# Altium PCB Nrf2Serial.PcbDoc
Units mm, origin at the board's own origin, x right, y up, seen from the top; angles counter-clockwise.
Board outline 67.95 x 20.8 mm, 2 copper layers (Top Layer, Bottom Layer); 14 components, 18 nets, 83 pads, 9 vias.
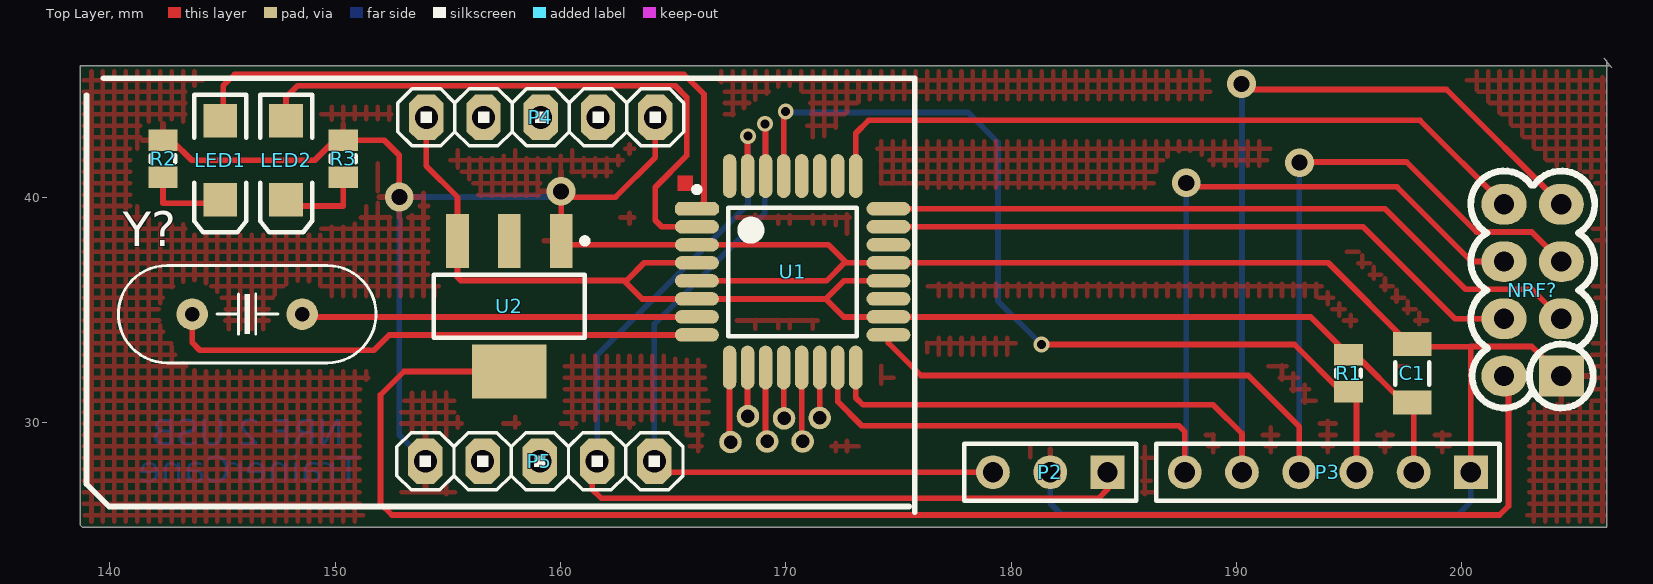
[diagram p0: Top Layer view]
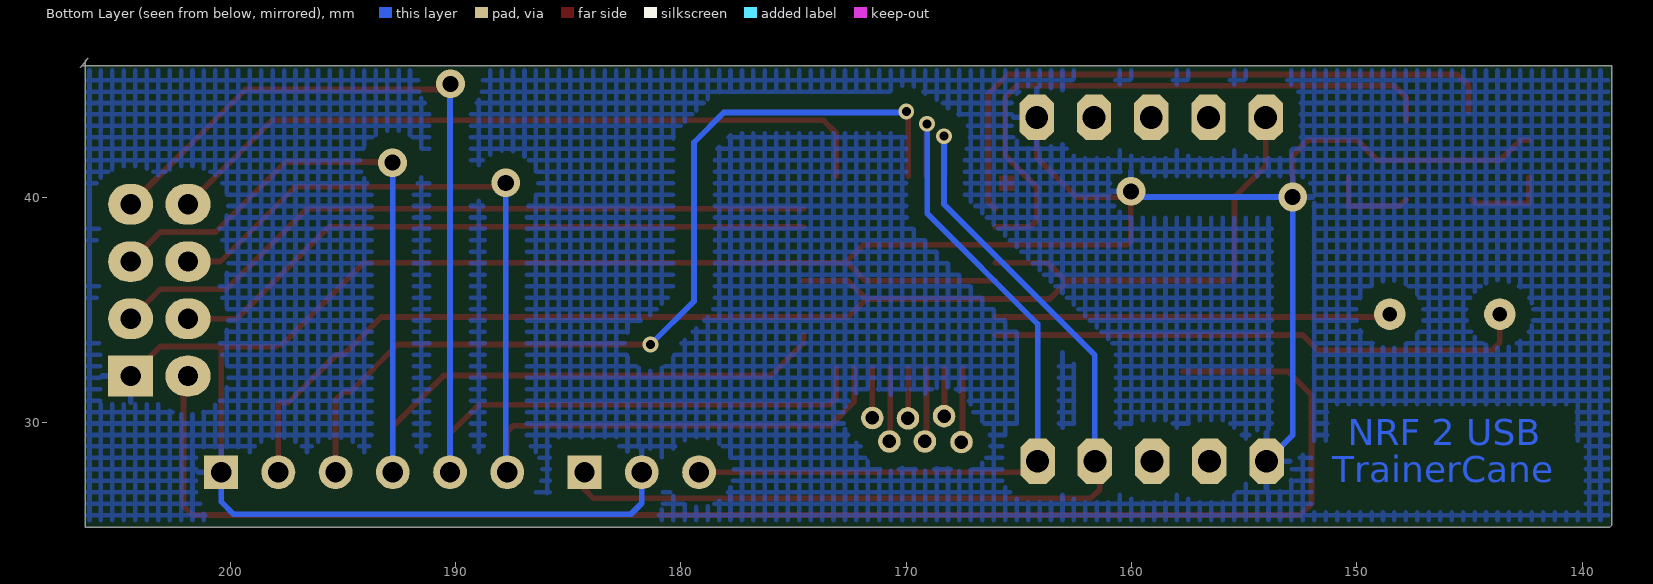
[diagram p1: Bottom Layer view, seen from below]
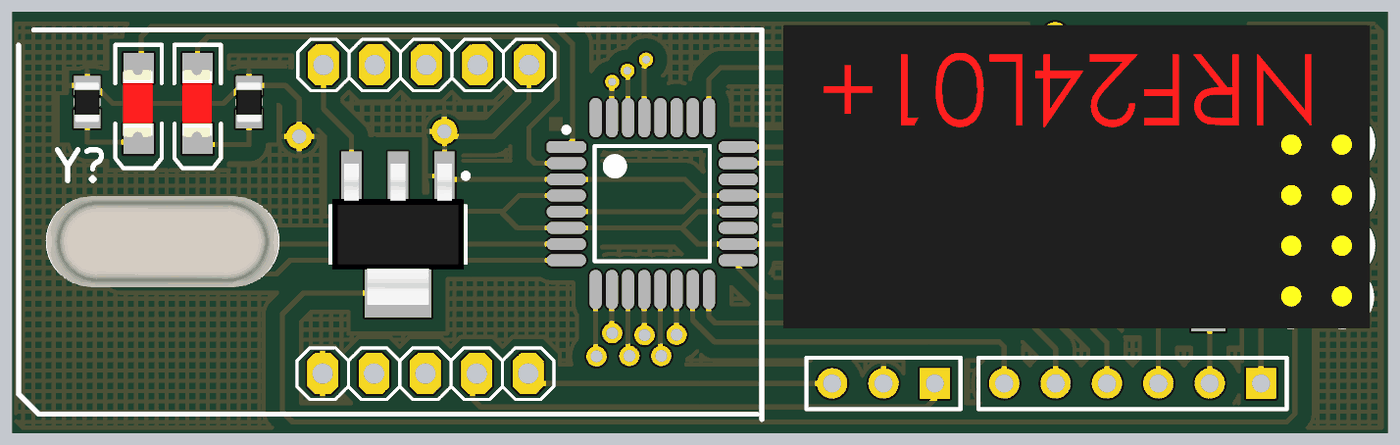
[diagram p2: 3D render of the assembled board from above, using the file's embedded part models]

## Layer stack, top to bottom
Top Layer: signal copper 0.0356
Dielectric: dielectric 0.32, FR-4, Dk 4.8
Bottom Layer: signal copper 0.0356

## Board outline
206.65,45.775 206.575,45.85 138.7,45.85 138.7,25.45 138.775,25.375 206.425,25.375 206.425,46.075 206.325,46.175

## Design rules (kind name [scope] priority, off if disabled: settings)
Clearance Clearance_1 [InPolygon] p1: gap=0.7
Clearance [All] p2: gap=0.2
PolygonConnect [All] p1: connectstyle=Relief reliefconductorwidth=0.254 reliefentries=4 polygonreliefangle="90 Angle" airgapwidth=0.254
RoutingVias [All] p1: holewidth=0.711 width=1.27 viastyle="Through Hole" minholewidth=0.4 minwidth=7 maxholewidth=0.711 maxwidth=1.27
SolderMaskExpansion [All] p1: expansion=0.102
Width [All] p1: maxlimit=0.254 minlimit=0.254 preferedwidth=0.254
28 further rules are at their usual default settings.

## Components (designator, comment, footprint, x,y, rotation, side; value= is the part's Value field where it differs from the comment)
C1 "100nF" SMD_CAP_1206 197.8,33.5 r270 top
LED1 "Color" "LED SMD 1206" 144.907,41.656 r270 top
LED2 "Color" "LED SMD 1206" 147.828,41.656 r270 top
NRF? "NRF24L01+_Module" NRF24L01+_Module 203.454,36.449 r180 top
P2 "Header 3" HDR1X3 184.277,27.813 r180 top
P3 "Programmer" HDR1X6 200.406,27.813 r180 top
P4 "Header 5" My_1X05 159.131,43.561 r180 top
P5 "Header 5" My_1X05 159.09,28.298 r0 top
R1 "10k" "RES 0805 (2012X06L)" 194.975,31.375 r90 top
R2 "1K" "RES 0805 (2012X06L)" 142.367,42.545 r270 top
R3 "1K" "RES 0805 (2012X06L)" 150.368,42.545 r270 top
U1 "ATmega8-16AI" My_32A_M 170.307,36.703 r0 top
U2 "LM1117IMP-x.x" MP04A_N 157.734,35.179 r270 top
Y? "12mhz" "XTAL Small" 146.1,34.825 r0 top

## Footprints (in the part's own frame and the unit in brackets; to place one, negate y for a bottom-side part, rotate by r counter-clockwise, add the part's x,y. Pads: shape width x height; smd on the part's side, far side on the other; paste and mask are expansions set on the pad)
HDR1X3 [mm] "Connector; Header; 3 Position"
  rect 1.5x1.5 hole 0.9: 1(0,0)
  round 1.5 hole 0.9: 2(2.54,0) 3(5.08,0)
  silkscreen extent -1.27,-1.27 6.35,1.27
HDR1X6 [mm] "Connector; Header; 6 Position"
  rect 1.5x1.5 hole 0.9: 1(0,0)
  round 1.5 hole 0.9: 2(2.54,0) 3(5.08,0) 4(7.62,0) 5(10.16,0) 6(12.7,0)
  silkscreen extent -1.27,-1.27 13.97,1.27
"LED SMD 1206" [mm]
  rect 1.5x1.5 smd: 1(-1.75,0) 2(1.75,0)
  silkscreen extent -2.9,-1.15 3.2,1.15, body extent -1.65,-0.76 1.65,0.69, height 1.36
MP04A_N [mm] "SOT223, 4-Leads, Body 6.5x3.5mm, Pitch 2.3mm, Lead Span 7mm, IPC Medium Density"
  rect 2.4x1 smd: 1(-2.9,2.3) 2(-2.9,0) 3(-2.9,-2.3)
  rect 2.4x3.3 smd: 4(2.9,0)
  silkscreen extent -3.02,-3.35 1.4,3.48, body extent -3.49,-3.24 3.49,3.24, height 1.64
My_1X05 [mil]
  oct 60x80 hole 40: 1(-200,0) 2(-100,0) 3(0,0) 4(100,0) 5(200,0)
  silkscreen extent -250,-50 250,50
My_32A_M [mm]
  oct 1.95x0.6 smd: 1(-4.25,2.8)
  oval 1.95x0.6 smd: 2(-4.25,2) 3(-4.25,1.2) 4(-4.25,0.4) 5(-4.25,-0.4) 6(-4.25,-1.2) 7(-4.25,-2) 8(-4.25,-2.8) 17(4.25,-2.8) 18(4.25,-2) 19(4.25,-1.2) 20(4.25,-0.4) 21(4.25,0.4) 22(4.25,1.2) 23(4.25,2) 24(4.25,2.8)
  oval 0.6x1.95 smd: 9(-2.8,-4.25) 10(-2,-4.25) 11(-1.2,-4.25) 12(-0.4,-4.25) 13(0.4,-4.25) 14(1.2,-4.25) 15(2,-4.25) 16(2.8,-4.25) 25(2.8,4.25) 26(2,4.25) 27(1.2,4.25) 28(0.4,4.25) 29(-0.4,4.25) 30(-1.2,4.25) 31(-2,4.25) 32(-2.8,4.25)
  silkscreen extent -4.37,-2.85 2.85,3.77, body extent -3.5,-3.5 3.5,3.5, height 1.2
NRF24L01+_Module [mm]
  rect 2x1.8 hole 0.9: 1(-0.965,4.369)
  oval 2x1.8 hole 0.9: 2(1.575,4.369) 3(-0.965,1.829) 4(1.575,1.829) 5(-0.965,-0.711) 6(1.575,-0.711) 7(-0.965,-3.251) 8(1.575,-3.251)
  silkscreen extent -2.45,-4.73 3.06,5.79, body extent -2.33,-9.08 26.67,5.92, height 9.1
"RES 0805 (2012X06L)" [mm] "Chip Resistor, 2-Leads, Body 2.0x1.3mm, IPC High Density _ (0.100 W)"
  rect 0.95x1.3 smd: 1(0,0) 2(1.65,0)
  silkscreen extent 0.67,-0.55 0.97,0.55, body extent -0.19,-0.63 1.84,0.64, height 0.6
SMD_CAP_1206 [mm]
  rect 1.05x1.7 smd: 1(0,0) 2(2.596,0)
  silkscreen extent 0.8,-0.75 1.8,0.75, body extent -0.22,-0.77 2.82,0.75, height 0.75
"XTAL Small" [mil]
  round 55 hole 25: 1(-96.06,0) 2(96.06,0)
  silkscreen extent -225,-85 225,85, body extent -226,-89 226,89, height 140

## Part data
C1: library part Cap-Bipolar, "Bipolar Capacitor"
LED1 LED2: library part LED, "LED"
P2: "Header, 3-Pin"
P3: library part "Header 6", "Header, 6-Pin"
P4 P5: "Header, 5-Pin"
R1 R2 R3: library part Resistor, "Resistor"
U1: "AVR 8K Bytes of In-System Programmable Flash Memory"
U2: "x.x Volt, 800mA Low-Dropout Linear Regulator, 4-pin SOT-223"
Y?: library part XTAL, "XTAL Crystal"

## Free pads (board coordinates)
  round 1 hole 0.6: 1(167.55,29.15) 1(168.325,30.3) 1(169.175,29.175) 1(169.925,30.2) 1(170.75,29.175) 1(171.507,30.218)

## Via types
v1: diameter 1.27, hole 0.711, Top Layer to Bottom Layer, 5 vias
v2: diameter 0.7, hole 0.4, Top Layer to Bottom Layer, 4 vias

## Nets (pads, with @x,y where several pads share a name; then routed paths per layer and width w, separated by ;. In a path a pad name is that pad's centre, name@x,y a point inside that pad or via, vN(x,y) a via of type N, cw(c..) or ccw(c..) an arc to the next point about the centre after c; other vN are vias at no path point)
CE: NRF?.3 U1.24 | length 31.9
  Top Layer w0.254: U1.24 196.597,39.503 200.175,35.925 203.114,35.925 NRF?.3
CSN: NRF?.4 U1.23 | length 29
  Top Layer w0.254: U1.23 195.622,38.703 199.705,34.62 NRF?.4
GND: C1.1 NRF?.1 P2.2 P3.1 P4.1 P5.1 R2.1 R3.1 U1.3 U1.5 U1.21 U2.1 | length 122.1
  Top Layer w0.254: R2.1 142.748,42.545 143.637,41.656 149.098,41.656 149.987,42.545 R3.1 152.18,42.545 152.85,41.875 v1(152.85,40.025) ; P4.1 164.211,41.783 162.447,40.019 160.034,40.019 U2.1 160.21,37.903 U1.3 171.901,37.903 172.701,37.103 ; U1.5 171.812,36.303 172.612,37.103 172.701,37.103 ; C1.1@197.725,33.45 194.072,37.103 U1.21 172.701,37.103 ; C1.1@197.975,33.375 200.4,33.375 200.4,27.819 P3.1 ; 200.4,33.393 203.106,33.393 NRF?.1
  Bottom Layer w0.254: P5.1 152.85,29.458 v1(152.85,40.025) v1@159.875,40.025 ; P2.2 181.737,26.438 182.225,25.95 199.85,25.95 200.406,26.506 P3.1
  other v1: 160.025,40.275
IRQ: NRF?.8 U1.25 | length 32.5
  Top Layer w0.254: U1.25 173.107,42.857 173.675,43.425 198.154,43.425 NRF?.8
MISO: NRF?.7 P3.5 U1.16 | length 54.2
  Top Layer w0.254: U1.16 173.107,31.118 173.425,30.8 188.975,30.8 190.246,29.529 P3.5 ; v1@190.275,44.8 199.319,44.8 NRF?.7
  Bottom Layer w0.254: P3.5 190.246,44.821 v1@190.275,44.85
  other v1: 190.225,45.05
MOSI: NRF?.6 P3.6 U1.15 | length 47.7
  Top Layer w0.254: U1.15 172.307,30.943 173.375,29.875 187.45,29.875 187.706,29.619 P3.6 ; v1(187.775,40.65) 187.95,40.475 197.125,40.475 200.44,37.16 NRF?.6
  Bottom Layer w0.254: P3.6 187.775,27.882 v1(187.775,40.65)
NetLED1_1: LED1.1 U1.1 | length 28.3
  Top Layer w0.254: LED1.1@145.034,43.815 145.034,44.958 145.542,45.466 165.49,45.466 166.37,44.586 166.37,39.816 U1.1
NetLED1_2: LED1.2 R2.2 | length 3.7
  Top Layer w0.254: R2.2 142.367,39.751 144.752,39.751 LED1.2
NetLED2_1: LED2.1 U1.2 | length 27.2
  Top Layer w0.254: LED2.1 147.828,44.45 148.336,44.958 165.1,44.958 165.603,44.455 165.603,41.853 164.211,40.461 164.211,38.989 164.497,38.703 U1.2
NetLED2_2: LED2.2 R3.2 | length 3.9
  Top Layer w0.254: LED2.2 148.11,39.624 150.368,39.624 R3.2
NetU1_7: U1.7 Y?.2 | length 17.6
  Top Layer w0.254: Y?.2 148.662,34.703 U1.7
NetU1_8: U1.8 Y?.1 | length 24.1
  Top Layer w0.254: Y?.1 143.66,33.565 144,33.225 151.725,33.225 152.403,33.903 U1.8
RES: P3.3 R1.1 U1.29 | length 40.4
  Top Layer w0.254: U1.29 169.907,43.482 v2@170.1,43.675 ; v2(181.35,33.475) 192.575,33.475 194.675,31.375 R1.1 195.326,31.024 P3.3
  Bottom Layer w0.254: 170.375,43.775 178.1,43.775 179.425,42.45 179.425,35.4 v2(181.35,33.475)
  other v2: 170,43.825
RXD: P2.1 P5.4 U1.31 | length 44.3
  Top Layer w0.254: P5.4 161.417,28.085 161.417,27.051 161.818,26.65 183.875,26.65 184.277,27.052 P2.1 ; U1.31 168.307,42.707 v2(168.325,42.725)
  Bottom Layer w0.254: P5.4 161.63,33.005 168.325,39.7 v2(168.325,42.725)
SCK: NRF?.5 P3.4 U1.17 | length 49.2
  Top Layer w0.254: U1.17 174.557,33.543 176,32.1 190.525,32.1 192.786,29.839 P3.4 ; v1@192.625,41.575 197.55,41.575 200.652,38.473 203.106,38.473 NRF?.5
  Bottom Layer w0.254: v1@192.7,41.175 192.786,41.089 P3.4
  other v1: 192.8,41.55
TXD: P2.3 P5.5 U1.30 | length 33.9
  Top Layer w0.254: P5.5@164.655,27.813 P2.3 ; v2(169.075,43.275) 169.107,43.243 U1.30
  Bottom Layer w0.254: P5.5 164.17,34.395 169.075,39.3 v2(169.075,43.275)
VCC: C1.2 P3.2 P4.5 R1.2 U1.4 U1.6 U1.18 U1.20 U2.3 | length 62
  Top Layer w0.254: P4.5 154.051,41.402 155.434,40.019 U2.3 155.434,36.463 155.575,36.322 162.941,36.322 163.722,37.103 U1.4 ; 162.877,36.258 163.633,35.503 U1.6 171.774,35.503 ; U1.20 172.574,36.303 171.774,35.503 ; P3.2 197.866,30.838 C1.2 197.421,30.904 195.3,33.025 R1.2 193.297,34.703 U1.18 172.574,34.703 171.774,35.503
VCC(3V): NRF?.2 U2.4 | length 67.3
  Top Layer w0.254: U2.4 153.054,32.279 152.019,31.244 152.019,26.416 152.527,25.908 201.676,25.908 202.075,26.307 202.075,31.884 NRF?.2
pads on no net: P4.2 P4.3 P4.4 P5.2 P5.3 U1.9 U1.10 U1.11 U1.12 U1.13 U1.14 U1.19 U1.22 U1.26 U1.27 U1.28 U1.32 U2.2
copper on no net: | length 15.3
  Top Layer w0.254: 167.5,29.45 167.507,29.457 167.507,32.453 ; 168.307,30.207 168.307,32.453 ; 169.107,29.507 169.107,32.453 ; 169.907,30.357 169.907,32.453 ; 170.707,29.732 170.707,32.453 ; 171.507,32.453 171.507,30.218 171.525,30.2

## Polygon pours and split planes (outlines as drawn)
GND on Top Layer "Bottom Layer-No Net" (hatched 90Degree grid 0.508 track 0.203, pour order 6): 138.925,26.275 138.85,26.35 138.85,45.6 205.975,45.6 206.1,45.475 206.375,45.2 206.375,25.625 139.175,25.625 138.85,25.95
GND on Bottom Layer "Bottom Layer-No Net" (hatched 90Degree grid 0.508 track 0.203, pour order 8): 138.85,25.625 138.85,45.65 206.3,45.65 206.375,45.575 206.325,45.525 206.325,25.675 138.9,25.675 138.85,25.725

## Other copper
Top Layer:
  rectangle: 165.2,40.3 165.875,40.975
Bottom Layer:
  text "NRF 2 USB" at 150.4,28.6 h2
  text "TrainerCane" at 151.1,26.975 h2

## Silkscreen, mask and mechanical layers (free items; w line width, h text height)
Top Overlay:
  lines w0.254: 138.974,44.539 138.974,27.289 139.974,26.289 151.974,26.289 175.474,26.289 ; 139.724,45.289 175.724,45.289 175.724,26.039